# EAGLE board Shiny Migelo (EAGLE 7.6.0)

Size 56.82 x 53.33 mm. Coordinates in mm from the lower left corner, seen from the top.
Outline: 0,0 56.82,0 56.82,53.33 0,53.33 0,0
Copper layers (1*16): Top 0.035mm / dielectric 1.5mm / Bottom 0.035mm
Design rules "default": minimum track width 10mil, minimum drill 24mil, track to track 8mil, track to pad 8mil, pad to pad 8mil, via to via 8mil, smd to smd 8mil, copper to edge 40mil, drill to drill 8mil, minimum pad ring 10mil, minimum via ring 8mil, stop-mask expansion 4mil, vias tented up to drill 0mil, thermal gap 10mil

## Footprints (pad centres in the part's own frame; a part is rotated, then mirrored left to right if it is on the bottom)
LED5MM = drill 0.813 octagon: A -1.27,0; K 1.27,0
2P-2.54-65/35MIL = drill 0.889 pad 1.651 square: 1 0,1.27 | drill 0.889 pad 1.651: 2 0,-1.27
0207/10 = drill 0.813 octagon: 1 -5.08,0; 2 5.08,0
DIP04YL = drill 0.813 long: 1 -3.81,-3.81; 2 -1.27,-3.81; 3 1.27,-3.81; 4 3.81,-3.81; 5 3.81,3.81; 6 1.27,3.81; 7 -1.27,3.81; 8 -3.81,3.81
DIL14 = drill 0.813 long: 1 -7.62,-3.81; 2 -5.08,-3.81; 3 -2.54,-3.81; 4 0,-3.81; 5 2.54,-3.81; 6 5.08,-3.81; 7 7.62,-3.81; 8 7.62,3.81; 9 5.08,3.81; 10 2.54,3.81; 11 0,3.81; 12 -2.54,3.81; 13 -5.08,3.81; 14 -7.62,3.81

## Placement (x,y rotation side)
D1  [LED5MM]  5,149.78 0 top  (outside the outline)
D2  [LED5MM]  5,162.48 0 top  (outside the outline)
P1  5V  [2P-2.54-65/35MIL]  5,175.18 0 top  (outside the outline)
R1  220‎Ω  [0207/10]  5,73.58 0 top  (outside the outline)
R2  220‎Ω  [0207/10]  5,86.28 0 top  (outside the outline)
R3  220‎Ω  [0207/10]  5,98.98 0 top  (outside the outline)
R4  220‎Ω  [0207/10]  5,111.68 0 top  (outside the outline)
R5  220‎Ω  [0207/10]  5,124.38 0 top  (outside the outline)
R6  220‎Ω  [0207/10]  5,137.08 0 top  (outside the outline)
SW2  [DIP04YL]  5,10.08 0 top
SW3  [DIP04YL]  5,60.88 0 top  (outside the outline)
U1  [DIL14]  5,22.78 0 top
U3  [DIL14]  5,35.48 0 top
U4  [DIL14]  5,48.18 0 top

## Library data of the parts
D1 D2 P1 R1-R6 SW2 SW3 U1 U3 U4 = AUTODESK_CIRCUITS_BREADBOARD

## Nets
N$1: SW2.5
N$2: SW2.6
N$3: U1.6
N$4: U1.10
N$5: U1.8
N$6: U1.12 U3.5
N$7: U1.9
N$8: U1.4
N$9: R5.1 U1.11 U3.2
N$10: U1.5
N$11: R6.2 U1.3 U1.13
N$12: U3.3 U4.8 U4.12
N$13: U4.10 U4.11
N$14: SW3.3
N$15: SW3.4
N$16: SW3.5
N$17: SW3.2 U4.13
N$18: SW3.6
N$19: P1.2 R1.2 R2.1 R3.2 R4.1 U1.14 U3.14 U4.14
N$20: U3.13
N$21: U3.6
N$22: U3.9
N$23: U3.12
N$24: U3.8
N$25: U3.10
N$26: U3.4
N$27: U3.11
N$28: R4.2 SW3.7
N$29: R1.1 SW2.8 U1.1
N$30: R2.2 SW2.7 U1.2
N$31: U3.1
N$32: D1.A R5.2
N$33: D2.A R6.1
N$34: D1.K D2.K P1.1 SW2.1 SW2.2 SW2.3 SW2.4 U1.7 U3.7
N$35: U4.1 U4.2 U4.3 U4.4 U4.5 U4.6 U4.7
N$36: R3.1 SW3.1 SW3.8 U4.9

## Tracks (layer width: path | path; a pad name or v marks a point on that pad's centre or on a via)
N$6  (1 unrouted)
N$9  (2 unrouted)
N$11  (2 unrouted)
N$12  (2 unrouted)
N$13  (1 unrouted)
N$17  (1 unrouted)
N$19  (7 unrouted)
N$28  (1 unrouted)
N$29  (2 unrouted)
N$30  (2 unrouted)
N$32  (1 unrouted)
N$33  (1 unrouted)
N$34  (8 unrouted)
N$35  (6 unrouted)
N$36  (3 unrouted)